# Altium PCB PCB.PcbDoc
Units mm, origin at the board's own origin, x right, y up, seen from the top; angles counter-clockwise.
Board outline 37.47 x 21.08 mm, 2 copper layers (Top Layer, Bottom Layer); 14 components, 29 nets, 103 pads, 0 vias.
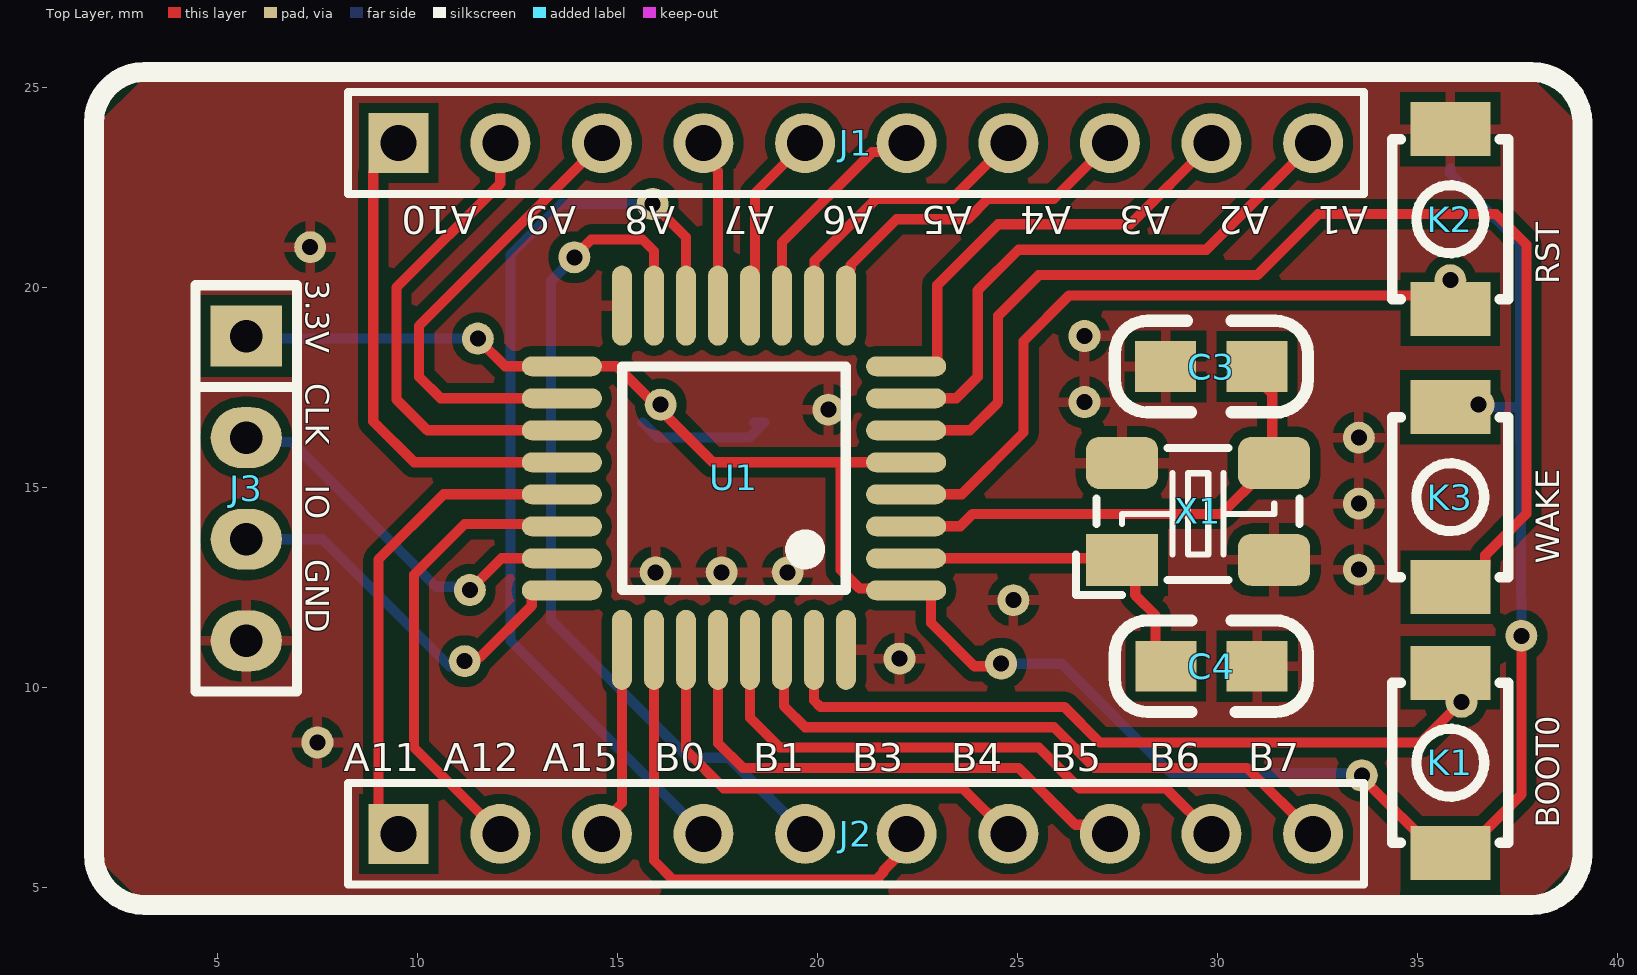
[diagram p0: Top Layer view]
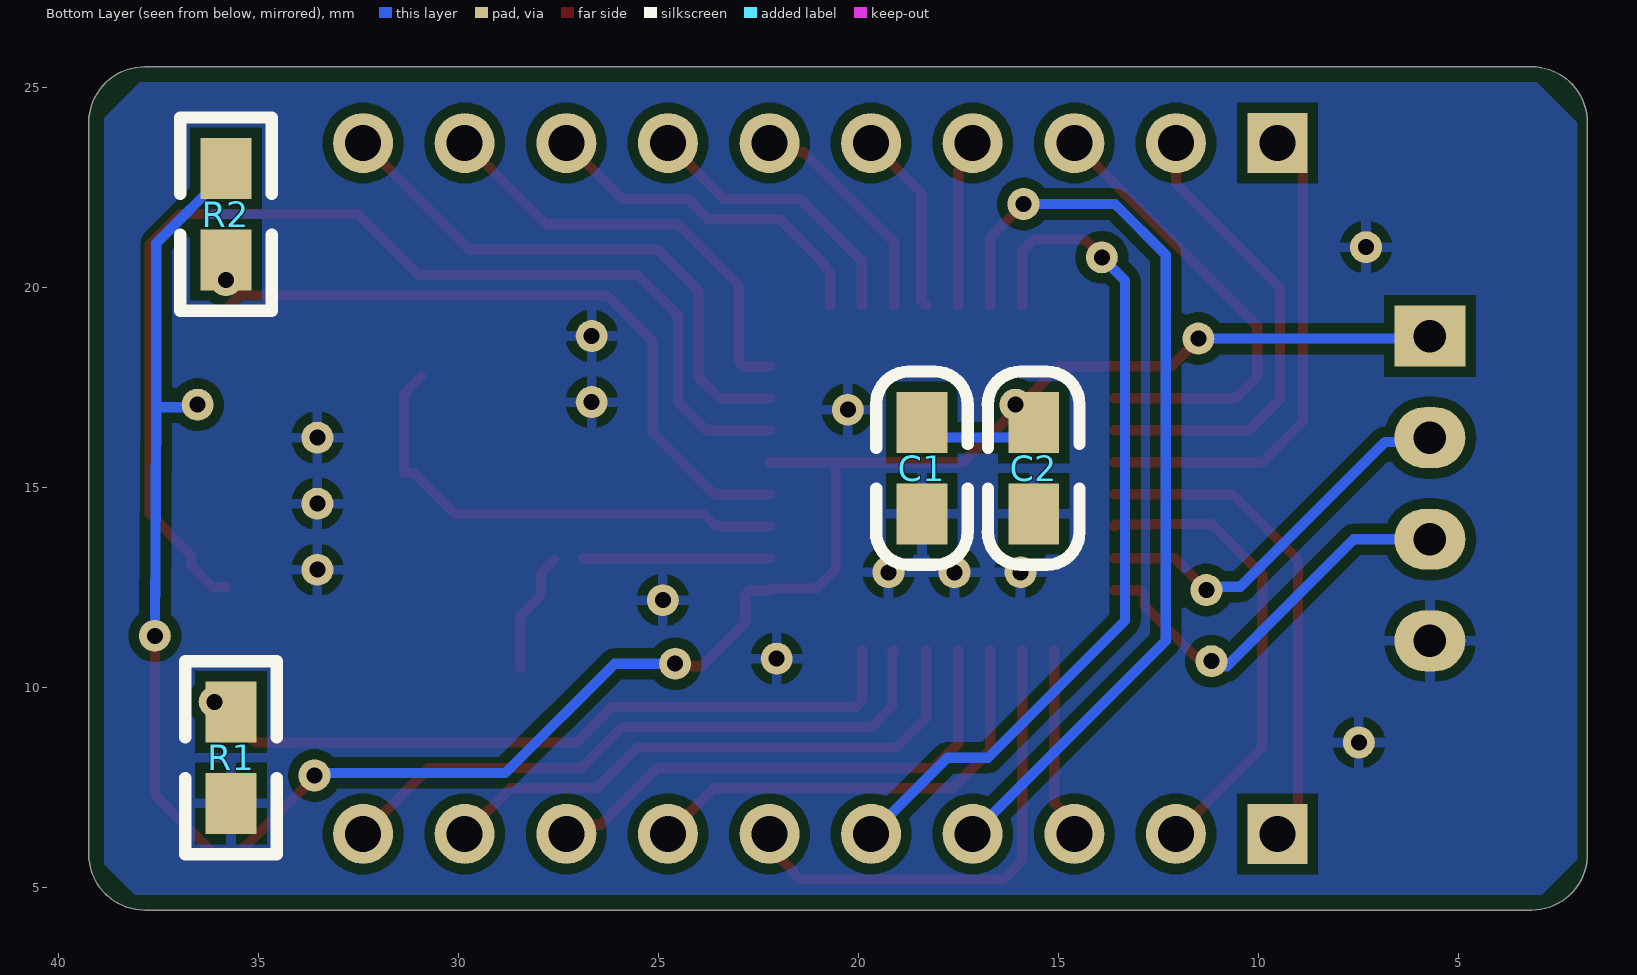
[diagram p1: Bottom Layer view, seen from below]

## Layer stack, top to bottom
Top Solder: solder mask 0.0102, Solder Resist, Dk 3.5
Top Layer: signal copper 0.0356
Dielectric 1: dielectric 0.32, FR-4, Dk 4.8
Bottom Layer: signal copper 0.0356
Bottom Solder: solder mask 0.0102, Solder Resist, Dk 3.5

## Board outline
3.175,4.445 cw(c3.175,5.842) 1.778,5.842 1.778,24.13 cw(c3.175,24.13) 3.175,25.527 37.846,25.527 cw(c37.846,24.13) 39.232,24.31 cw(c39.116,24.257) 39.243,24.257 39.243,5.842 cw(c37.846,5.842) 37.846,4.445

## Design rules (kind name [scope] priority, off if disabled: settings)
Clearance [All] p1: gap=0.254 ignorepadtopadclearanceinfootprint=FALSE except(0: Arc-Hole Track-Hole SMDPad-Hole THPad-Hole Via-Hole Fill-Hole Poly-Hole Region-Hole Text-Hole)
PolygonConnect [All] p1: connectstyle=Relief reliefconductorwidth=0.254 reliefentries=4 polygonreliefangle="90 Angle" airgapwidth=0.254
RoutingVias [All] p1: holewidth=0.711 width=1.27 viastyle="Through Hole" minholewidth=0.711 minwidth=1.27 maxholewidth=0.711 maxwidth=1.27
SolderMaskExpansion [All] p1: expansion=0.102 istentingtop=FALSE
Width [All] p1: maxlimit=0.254 minlimit=0.254 preferedwidth=0.254
30 further rules are at their usual default settings.

## Components (designator, comment, footprint, x,y, rotation, side; value= is the part's Value field where it differs from the comment)
C1 "104" 0805C 18.425,14.369 r90 bottom
C2 "105" 0805C 15.631,14.369 r90 bottom
C3 "20P" 0805C 30.967,18.024 r180 top
C4 "20P" 0805C 28.72,10.551 r0 top
J1 "Pin HDR1X10" "Pin HDR1X10/2.54mm-S" 9.525,23.622 r0 top
J2 "Pin HDR1X10" "Pin HDR1X10/2.54mm-S" 9.525,6.35 r0 top
J3 "Pin HDR1X4" "Pin HDR1X4/2.54mm-S" 5.715,18.796 r0 top
K1 "BOOT" SW-SMD_L3.9-W2.9-P4.15-LS5.0 35.814,8.128 r90 top
K2 "RST" SW-SMD_L3.9-W2.9-P4.15-LS5.0 35.814,21.717 r270 top
K3 "WAKE" SW-SMD_L3.9-W2.9-P4.15-LS5.0 35.814,14.768 r270 top
R1 "10K" 0805R 35.687,7.112 r90 bottom
R2 "10K" 0805R 35.814,22.987 r270 bottom
U1 "STM32F030K6T6" "LQFP32 7X7" 17.907,15.24 r90 top
X1 "8M" "OSC 5032-4P" 29.509,14.351 r0 top

## Footprints (in the part's own frame and the unit in brackets; to place one, negate y for a bottom-side part, rotate by r counter-clockwise, add the part's x,y. Pads: shape width x height; smd on the part's side, far side on the other; paste and mask are expansions set on the pad)
0805C [mil]
  rect 60x50 smd: 1(-0.71,-0.4) 2(89.29,-0.4)
  silkscreen extent -51,-45 139,45, body extent 6,-25 84,25, height 31
0805R [mil]
  rect 60x50 smd: 1(0,0) 2(90,0)
  silkscreen extent -50,-45 140,45, body extent 1,-25 80,25, height 15
"LQFP32 7X7" [mm]
  oval 0.5x2 smd: 1(-2.8,-4.303) 2(-2,-4.303) 3(-1.2,-4.303) 4(-0.4,-4.303) 5(0.4,-4.303) 6(1.2,-4.303) 7(2,-4.303) 8(2.8,-4.303) 17(2.8,4.303) 18(2,4.303) 19(1.2,4.303) 20(0.4,4.303) 21(-0.4,4.303) 22(-1.2,4.303) 23(-2,4.303) 24(-2.8,4.303)
  oval 2x0.5 smd: 9(4.317,-2.8) 10(4.317,-2) 11(4.317,-1.2) 12(4.317,-0.4) 13(4.317,0.4) 14(4.317,1.2) 15(4.317,2) 16(4.317,2.8) 25(-4.289,2.8) 26(-4.289,2) 27(-4.289,1.2) 28(-4.289,0.4) 29(-4.289,-0.4) 30(-4.289,-1.2) 31(-4.289,-2) 32(-4.289,-2.8)
  silkscreen extent -2.79,-2.79 2.79,2.79, body extent -4.51,-4.5 4.5,4.5, height 1.45
"OSC 5032-4P" [mm]
  rect 1.8x1.3 smd: 1(-1.9,-1.15)
  rrect50% 1.8x1.3 smd: 2(1.9,-1.15) 3(1.9,1.272) 4(-1.9,1.272)
  silkscreen extent -3.05,-2.03 2.54,1.65, body extent -2.5,-1.65 2.5,1.55, height 0.86
"Pin HDR1X4/2.54mm-S" [mil]
  rect 70x60 hole 32: 1(0,0)
  oval 70x60 hole 32: 2(0,-100) 3(0,-200) 4(0,-300)
  silkscreen extent -50,-350 50,50, body extent -50,-350 50,50, height 336
"Pin HDR1X10/2.54mm-S" [mm]
  rect 1.5x1.5 hole 0.9: 1(0,0)
  round 1.5 hole 0.9: 2(2.54,0) 3(5.08,0) 4(7.62,0) 5(10.16,0) 6(12.7,0) 7(15.24,0) 8(17.78,0) 9(20.32,0) 10(22.86,0)
  silkscreen extent -1.27,-1.27 24.13,1.27, body extent -1.27,-1.27 24.13,1.27, height 7.58
SW-SMD_L3.9-W2.9-P4.15-LS5.0 [mm]
  rect 1.35x2 smd: 1(-2.25,0) 3(2.25,0)
  silkscreen extent -2,-1.45 2,1.45

## Part data
C1 C2 C3 C4: library part CAP, "无极性电容"
K1 K2 K3: library part KEY
R1 R2: library part RES
U1: Package=None, Availability=Unavailable, MF="{'manufacturer': u'STMicroelectronics'}", MP=STM32F030K6T6, Price=None
X1: library part XTAL-4P, "4脚无源晶振"

## Free pads (board coordinates)
  round 0.8 hole 0.4 mask+0.102: 3(7.313,21.018) 3(7.493,8.636) 3(11.176,10.668) 3(11.303,12.446) 3(11.504,18.732) 3(13.917,20.764) 3(15.875,22.098) 3(15.949,12.89) 3(16.076,17.081) 3(17.6,12.89) 3(19.251,12.89) 3(20.267,16.954) 3(22.045,10.731) 3(24.585,10.604) 3(24.892,12.192) 3(26.67,17.145) 3(26.67,18.796) 3(33.528,12.954) 3(33.528,14.605) 3(33.528,16.256) 3(33.602,7.81) 3(35.814,20.193) 3(36.096,9.652) 3(36.523,17.081) 3(37.592,11.303)

## Nets (pads, with @x,y where several pads share a name; then routed paths per layer and width w, separated by ;. In a path a pad name is that pad's centre, name@x,y a point inside that pad or via, vN(x,y) a via of type N, cw(c..) or ccw(c..) an arc to the next point about the centre after c; other vN are vias at no path point)
+3.3: C1.2 C2.2 J3.1 K1.1 K3.1 pad.3@11.504,18.732 pad.3@16.076,17.081 pad.3@24.585,10.604 pad.3@33.602,7.81 pad.3@36.523,17.081 pad.3@37.592,11.303 R2.1 U1.1 U1.5 U1.17 | length 63.1
  Top Layer w0.254: pad.3@11.557,18.669 12.186,18.04 U1.17 14.98,18.04 17.38,15.64 20.574,15.64 ; U1.5@22.229,15.621 U1.5 20.574,15.64 ; pad.3@24.638,10.541 23.917,10.541 22.833,11.625 22.833,12.326 22.72,12.44 U1.1 22.163,12.487 21.041,12.487 20.574,12.954 20.574,15.64 ; pad.3@33.655,7.747 33.655,7.712 35.489,5.878 K1.1 36.139,5.878 37.592,7.331 37.592,11.262 37.569,11.285 37.569,11.58 pad.3@37.592,11.303
  Bottom Layer w0.254: J3.1 5.779,18.732 pad.3@11.504,18.732 ; C2.2 16.002,16.256 18.288,16.256 18.669,16.637 C1.2 ; pad.3@24.585,10.604 26.098,10.604 28.829,7.874 pad.3@33.655,7.874 ; R2.1 35.814,22.86 37.556,21.118 37.556,17.018 ; pad.3@36.523,17.081 36.586,17.018 37.556,17.018 ; pad.3@37.592,11.303 37.556,17.018
GND: C1.1 C2.1 C3.2 C4.2 J3.4 K2.1 pad.3@7.313,21.018 pad.3@7.493,8.636 pad.3@15.949,12.89 pad.3@17.6,12.89 pad.3@19.251,12.89 pad.3@20.267,16.954 pad.3@22.045,10.731 pad.3@24.892,12.192 pad.3@26.67,17.145 pad.3@26.67,18.796 pad.3@33.528,12.954 pad.3@33.528,14.605 pad.3@33.528,16.256 R1.1 U1.16 U1.32 X1.2 X1.4
NetJ1_1: J1.1 U1.20 | length 11.4
  Top Layer w0.254: J1.1@8.89,22.895 8.89,16.66 9.91,15.64 U1.20
NetJ1_2: J1.2 U1.19 | length 11.2
  Top Layer w0.254: 12.065,22.86 12.065,22.606 9.467,20.008 9.467,17.214 10.242,16.44 U1.19
NetJ1_3: J1.3 U1.18 | length 11.2
  Top Layer w0.254: U1.18 10.573,17.24 10.033,17.78 10.033,19.05 J1.3@14.404,23.421
NetJ1_4: J1.4 U1.13 | length 4.4
  Top Layer w0.254: J1.4@17.013,23.754 17.013,23.417 17.507,22.923 U1.13
NetJ1_5: J1.5 U1.12 | length 5
  Top Layer w0.254: U1.12 18.434,19.684 18.434,22.371 J1.5@19.94,23.877
NetJ1_6: J1.6 U1.11 | length 5.7
  Top Layer w0.254: U1.11 19.107,21.139 21.362,23.394 21.997,23.394 J1.6
NetJ1_7: J1.7 U1.10 | length 7.5
  Top Layer w0.254: U1.10 19.918,19.568 19.918,20.68 21.463,22.225 23.368,22.225 J1.7@24.968,23.825
NetJ1_8: J1.8 U1.9 | length 8.8
  Top Layer w0.254: U1.9 20.707,20.374 20.826,20.493 20.826,20.572 21.971,21.717 23.749,21.717 24.257,22.225 25.908,22.225 J1.8
NetJ1_9: J1.9 U1.8 | length 11.1
  Top Layer w0.254: U1.8 22.873,18.04 22.987,18.154 22.987,20.066 24.511,21.59 27.813,21.59 J1.9
NetJ1_10: J1.10 U1.7 | length 14.1
  Top Layer w0.254: U1.7 23.463,17.24 24.003,17.78 24.003,19.939 25.019,20.955 29.718,20.955 J1.10
NetJ2_4: J2.4 pad.3@15.875,22.098 U1.14 | length 23.4
  Top Layer w0.254: pad.3@15.875,22.098 16.707,21.266 U1.14
  Bottom Layer w0.254: pad.3@15.875,22.098 13.589,22.098 12.319,20.828 12.319,11.176 J2.4
NetJ2_5: J2.5 pad.3@13.917,20.764 U1.15 | length 21.6
  Top Layer w0.254: pad.3@13.917,20.764 13.917,20.787 14.339,21.209 15.621,21.209 15.907,20.923 U1.15
  Bottom Layer w0.254: pad.3@13.917,20.764 13.335,20.183 13.335,11.684 16.764,8.255 17.78,8.255 J2.5
NetJ2_6: J2.6 U1.26 | length 12.5
  Top Layer w0.254: U1.26 15.907,5.683 16.383,5.207 21.463,5.207 21.643,5.387 21.643,5.43 22.225,6.013 J2.6
NetJ2_7: J2.7 U1.27 | length 11.4
  Top Layer w0.254: U1.27 16.707,8.439 17.653,7.493 23.622,7.493 J2.7
NetJ2_8: J2.8 U1.28 | length 13.1
  Top Layer w0.254: U1.28 17.507,8.617 18.123,8.001 25.019,8.001 26.442,6.578 27.077,6.578 J2.8
NetJ2_9: J2.9 U1.29 | length 14.4
  Top Layer w0.254: U1.29 18.307,9.252 19.05,8.509 25.527,8.509 26.543,7.493 28.702,7.493 J2.9
NetJ2_10: J2.10 U1.30 | length 16
  Top Layer w0.254: U1.30 19.154,10.904 19.154,9.548 19.685,9.017 25.908,9.017 26.924,8.001 30.734,8.001 J2.10
NetK1_3: K1.3 pad.3@36.096,9.652 R1.2 U1.31 | length 18.3
  Top Layer w0.254: U1.31 19.907,9.684 20.066,9.525 26.162,9.525 27.051,8.636 35.08,8.636 pad.3@36.096,9.652
NetK2_3: K2.3 pad.3@35.814,20.193 R2.2 U1.4 | length 17.1
  Top Layer w0.254: U1.4 23.603,14.84 25.146,16.383 25.146,18.669 26.289,19.812 35.469,19.812 K2.3
NetK3_3: K3.3 U1.6 | length 28.9
  Top Layer w0.254: U1.6 23.806,16.44 24.511,17.145 24.511,19.304 25.527,20.32 30.988,20.32 32.512,21.844 36.957,21.844 37.719,21.082 37.719,14.351 36.687,13.319 36.687,13.066 36.139,12.518 K3.3
OSC_IN: C4.1 U1.2 X1.1 | length 7.7
  Top Layer w0.254: U1.2 X1.1@26.892,13.24 ; X1.1 27.94,12.87 27.94,12.319 28.448,11.811 C4.1@28.448,10.496
OSC_OUT: C3.1 U1.3 X1.3 | length 12.3
  Top Layer w0.254: U1.3 23.565,14.04 23.876,14.351 30.096,14.351 31.114,15.369 31.364,15.369 31.364,17.356 C3.1@30.94,17.78
PA11: J2.1 U1.21 | length 12.5
  Top Layer w0.254: J2.1@9.639,6.236 9.017,6.858 9.017,13.208 10.649,14.84 U1.21
PA12: J2.2 U1.22 | length 12
  Top Layer w0.254: J2.2@12.332,6.083 9.906,8.509 9.906,12.827 11.176,14.097 12.623,14.097 12.633,14.087 13.557,14.087 U1.22
PA15: J2.3 U1.25 | length 4.8
  Top Layer w0.254: J2.3 14.605,6.62 15.107,7.122 U1.25
SW_CLK: J3.3 pad.3@11.176,10.668 U1.24 | length 10.1
  Top Layer w0.254: pad.3@11.304,10.509 11.304,10.649 11.428,10.772 11.568,10.772 12.852,12.057 12.852,12.326 12.966,12.44 U1.24
  Bottom Layer w0.254: J3.3 7.62,13.716 10.795,10.541 pad.3@11.176,10.541
SW_IO: J3.2 pad.3@11.303,12.446 U1.23 | length 9.8
  Top Layer w0.254: pad.3@11.303,12.446 12.097,13.24 U1.23
  Bottom Layer w0.254: J3.2 5.82,16.151 6.836,16.151 10.458,12.529 11.22,12.529 pad.3@11.303,12.446

## Polygon pours and split planes (outlines as drawn)
GND on Bottom Layer "GND_L02_P001" (solid, pour order 1): 37.973,25.146 38.862,24.257 38.862,5.588 38.1,4.826 2.921,4.826 2.032,5.715 2.032,24.13 3.048,25.146
GND on Top Layer "GND_L01_P000" (solid, pour order 0): 37.973,25.146 38.862,24.257 38.862,5.588 38.1,4.826 2.921,4.826 2.032,5.715 2.032,24.13 3.048,25.146

## Silkscreen, mask and mechanical layers (free items; w line width, h text height)
Top Overlay:
  lines w0.5: 7.747,4.572 37.846,4.572 ccw(c37.846,5.842) 39.116,5.842 39.116,24.13 ccw(c37.846,24.13) 37.846,25.4 3.175,25.4 ccw(c3.175,24.13) 1.905,24.13 1.905,5.842 ccw(c3.175,5.842) 3.175,4.572 8.001,4.572
  text "A1    A2    A3    A4    A5    A6    A7    A8    A9    A10" at 33.759,22.276 h1.2 r180
  text "3.3V   CLK    IO    GND" at 6.997,20.193 h1 r270
  text "RST" at 38.735,20.094 h1 r90
  text "WAKE" at 38.735,13.109 h1 r90
  text "A11  A12  A15   B0    B1    B3    B4    B5    B6    B7" at 8.151,7.68 h1.2
  text "BOOT0" at 38.735,6.505 h1 r90
Mechanical 1:
  lines w0.254: 7.747,4.572 37.846,4.572 ccw(c37.846,5.842) 39.116,5.842 39.116,24.257 ; 8.001,4.572 3.175,4.572 cw(c3.175,5.842) 1.905,5.842 1.905,24.13 cw(c3.175,24.13) 3.175,25.4 37.846,25.4 cw(c37.846,24.13) 39.116,24.13